# Altium PCB CL-HC-V2.0.PcbDoc (part 2 of 3)
Units mil, origin at the board's own origin, x right, y up, seen from the top; angles counter-clockwise.
Board outline 12846.15 x 9153.85 mil, 2 copper layers (TopLayer, BottomLayer); 137 components, 528 nets, 534 pads, 1 vias.
Unrouted connection lines stored in the file: 27.
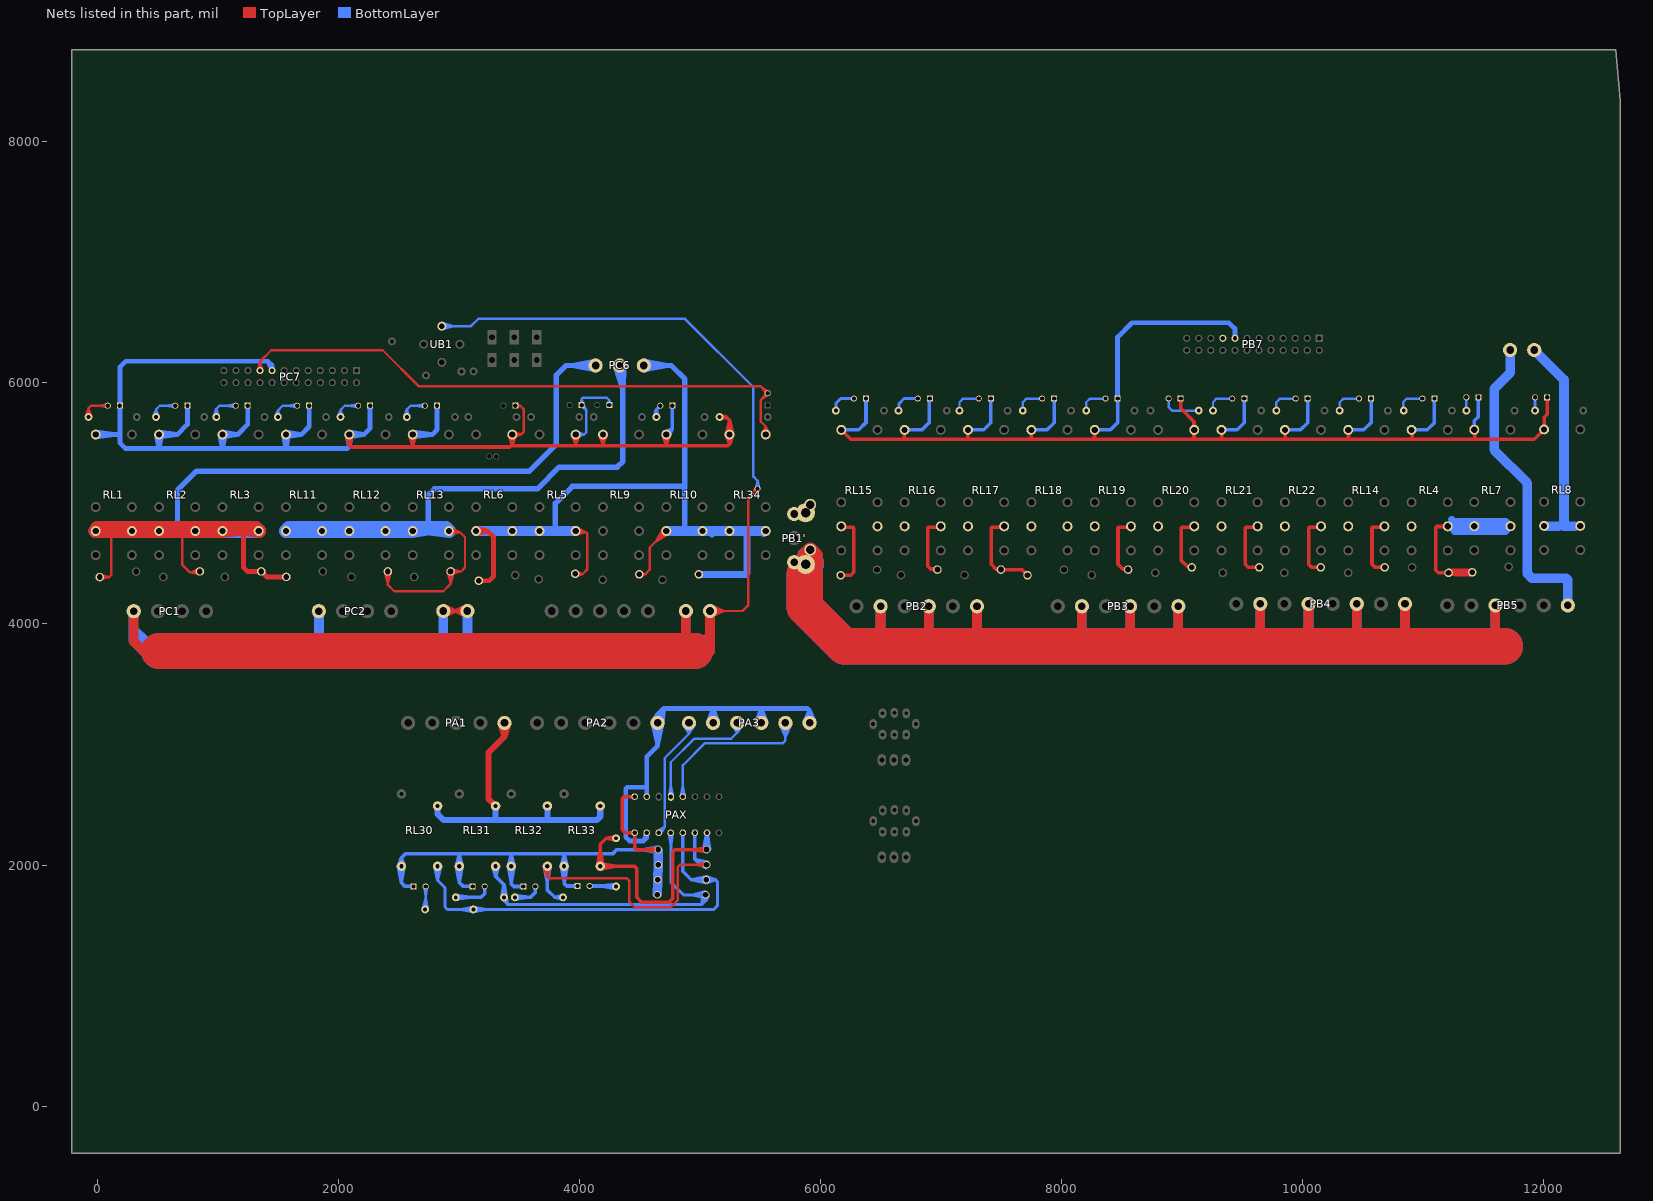
[diagram p2: the nets of this part, all layers, seen from the top]

## Via types
v1: diameter 40, hole 24, TopLayer to BottomLayer, tented both sides, 1 vias

## Nets (pads, with @x,y where several pads share a name; then routed paths per layer and width w, separated by ;. In a path a pad name is that pad's centre, name@x,y a point inside that pad or via, vN(x,y) a via of type N, cw(c..) or ccw(c..) an arc to the next point about the centre after c; other vN are vias at no path point) (continued)
24V: D15.A D16.A D17.A D18.A D19.K D20.K D21.K D22.K D37.A D38.A D39.A D40.A D41.A D42.A D43.A D44.A D45.A D46.A D47.A D48.A D49.A D50.A D51.A D52.A D53.A D54.A D55.A D61.A D65.A D67.A pad.0@11427.56,5602.53 PAX.1 PAX.2 PB7.15 PC7.15 R292.1 RL1.1 RL2.1 RL3.1 RL4.1 RL5.2 RL6.2 RL7.1 RL8.1 RL9.1 RL10.1 RL11.1 RL12.1 RL13.1 RL14.1 RL15.1 RL16.1 RL17.1 RL18.1 RL19.1 RL20.2 RL21.1 RL22.1 RL30.1 RL31.1 RL32.1 RL33.1 RL34.2 | length 42944.3
  TopLayer w20: RL6.2@3444.58,5570.44 3516.48,5570.44 ; RL6.2@3445.47,5559.14 3516.48,5570.44 ; RL6.2@3445.47,5581.75 3516.48,5570.44 ; RL6.2@3451.41,5539.86 3516.48,5570.44 ; RL6.2@3451.41,5601.03 3516.48,5570.44 ; D61.A@3470,5810 3510.78,5810 ; D61.A@3472.28,5796.57 3510.78,5810 ; D61.A@3472.28,5823.43 3510.78,5810 ; RL5.2@3939.6,5564.93 3970.45,5481.32 ; RL5.2@3959.13,5569.72 3970.45,5481.32 ; 3967.81,5478.68 3970.45,5481.32 ; RL5.2@3970.45,5570.44 3970.45,5481.32 ; RL5.2@3981.77,5569.72 3970.45,5481.32 ; RL5.2@4001.3,5564.93 3970.45,5481.32 ; RL9.1@4165.46,5564.99 4196.32,5480.39 ; RL9.1@4185.01,5569.73 4196.32,5480.39 ; RL9.1@4196.32,5570.44 4196.32,5480.39 ; 4198.04,5478.68 4196.32,5480.39 ; RL9.1@4207.64,5569.73 4196.32,5480.39 ; RL9.1@4227.18,5564.99 4196.32,5480.39 ; 3510.78,5810 3538.67,5782.11 3538.67,5592.63 3516.48,5570.44
  TopLayer w30: RL12.1@2066.79,5566.5 2092.83,5482.44 ; RL12.1@2092.83,5570.44 2092.83,5482.44 ; RL12.1@2118.87,5566.5 2092.83,5482.44 ; RL13.1@2592.64,5566.62 2618.7,5479.67 ; RL13.1@2618.7,5570.44 2618.7,5479.67 ; RL13.1@2644.76,5566.62 2618.7,5479.67 ; RL6.2@3418.59,5566.18 3444.58,5489.13 ; RL6.2@3444.58,5570.44 3444.58,5489.13 ; RL6.2@3470.57,5566.18 3444.58,5489.13 ; PAX.1@4459.58,2567.3 4370.91,2567.3 4355.83,2552.22 4355.83,2292.22 4380.75,2267.3 ; D19.K@4655.16,2111.75 4534.78,2128.21 D19.K@4655.16,2144.67 ; D19.K@4656.28,2128.21 4473.6,2128.21 4459.58,2142.22 PAX.2@4459.58,2267.3 ; RL10.1@4696.14,5566.58 4722.2,5480.51 ; RL10.1@4722.2,5570.44 4722.2,5480.51 ; RL10.1@4748.25,5566.58 4722.2,5480.51 ; R292.1@5166.09,5699.02 5220.02,5716.31 ; R292.1@5166.09,5733.6 5220.02,5716.31 ; RL34.2@5220.52,5573.35 5246.7,5689.63 ; RL34.2@5220.74,5565.99 5246.7,5492.48 ; RL34.2@5272.66,5565.99 5246.7,5492.48 ; RL34.2@5272.88,5573.35 5246.7,5689.63 ; RL15.1@6173.4,5609.8 6252.01,5531.19 11921.14,5531.19 RL8.1@12003.49,5613.54 ; 6696.86,5534.16 RL16.1@6696.86,5602.53 ; 7222.57,5534.16 RL17.1@7222.57,5602.53 ; 7748.28,5534.16 RL18.1@7748.28,5602.53 ; 8274,5534.16 RL19.1@8274,5602.53 ; D37.A@8988.5,5869.33 8988.5,5789.33 9099.71,5678.13 9099.71,5534.16 ; 9329.69,5534.16 RL21.1@9329.69,5602.53 ; 9855.4,5534.16 RL22.1@9855.4,5602.53 ; 10381.11,5534.16 RL14.1@10381.11,5602.53 ; 10909.59,5538.92 RL4.1@10909.59,5607.29 ; 11427.56,5534.16 pad.0@11427.56,5602.53 ; RL8.1@12004.84,5612.19 RL8.1@12003.49,5613.54 ; D43.A@12028.5,5879.33 12028.5,5739.33 12003.49,5714.32 RL8.1@12003.49,5613.54 ; 2092.83,5482.44 2107.94,5467.33 2631.05,5467.33 ; 2618.7,5479.67 2631.05,5467.33 ; 2631.05,5467.33 3422.77,5467.33 3434.12,5478.68 ; 3434.12,5478.68 3444.58,5489.13 ; 3434.12,5478.68 3967.81,5478.68 4198.04,5478.68 4720.36,5478.68 ; 4380.75,2267.3 PAX.2@4459.58,2267.3 ; 4380.75,2267.3 PAX.2@4459.58,2267.3 ; 4720.36,5478.68 5232.9,5478.68 5246.7,5492.48 ; 4720.36,5478.68 4722.2,5480.51 ; 5220.02,5716.31 R292.1@5163.39,5716.31 5220.02,5716.31 ; 5220.02,5716.31 5246.7,5689.63 ; 5246.7,5492.48 RL34.2@5246.7,5570.44 5246.7,5689.63
  BottomLayer w20: RL5.2@3970.45,5570.44 4039.6,5570.44 ; RL5.2@3971.38,5559.14 4039.6,5570.44 ; RL5.2@3971.38,5581.74 4039.6,5570.44 ; RL5.2@3977.55,5539.92 4039.6,5570.44 ; RL5.2@3977.55,5600.97 4039.6,5570.44 ; D65.A@4006.5,5816.86 4020,5865 ; D65.A@4011.63,5804.25 4059.04,5775.96 ; D65.A@4030.75,5823.37 4059.04,5775.96 ; D65.A@4033.5,5816.86 4020,5865 ; D67.A@4235.85,5818.25 4249.27,5855.73 ; D67.A@4249.27,5815.92 4249.27,5855.73 ; D67.A@4262.69,5818.25 4249.27,5855.73 ; 4020,5865 D65.A@4020,5815 4059.04,5775.96 ; 4020,5865 4030,5875 4230,5875 4249.27,5855.73 ; 4039.6,5570.44 4059.04,5589.88 4059.04,5775.96
  BottomLayer w30: RL30.1@2500.84,1987.79 2525.1,1860.72 RL30.1@2549.36,1987.79 ; RL30.1@2501.09,1994.25 2525.1,2061.49 ; RL30.1@2549.12,1994.25 2525.1,2061.49 ; D18.A@2625.83,1822.74 2555.32,1822.74 2525.1,1852.95 RL30.1@2525.1,1990.09 2525.1,2061.49 ; RL31.1@2981.57,1987.79 3005.83,1860.72 RL31.1@3030.09,1987.79 ; RL31.1@2981.64,1993.06 3005.83,2090.09 ; RL31.1@3030.02,1993.06 3005.83,2090.09 ; D17.A@3115.83,1822.74 3039.21,1822.74 3005.83,1856.11 RL31.1@3005.83,1990.09 3005.83,2090.09 ; RL32.1@3411.24,1987.79 3435.5,1860.72 ; RL32.1@3411.31,1993.06 3435.5,2090.09 ; RL32.1@3459.69,1993.06 3435.5,2090.09 ; RL32.1@3459.76,1987.79 3435.5,1860.72 ; RL33.1@3849.96,1987.79 3874.22,1860.72 RL33.1@3898.48,1987.79 ; RL33.1@3850.03,1993.06 3874.22,2090.09 ; RL33.1@3898.41,1993.06 3874.22,2090.09 ; D15.A@3973.91,1826.11 3895.83,1826.11 ; D15.A@3985.83,1826.11 3895.83,1826.11 ; D21.K@4623.76,1750.99 D20.K@4628.18,1874.4 ; D21.K@4623.92,1755.72 D20.K@4652.32,1877.75 ; D21.K@4624.01,1756.32 D20.K@4656.28,1882.75 ; D21.K@4624.98,1760.27 D20.K@4676.63,1876.04 ; D22.K@4631.96,1999.77 D20.K@4652.32,1877.75 ; D22.K@4632.02,2003.74 D19.K@4656.28,2128.21 ; D22.K@4632.12,2004.57 D20.K@4628.14,1880.79 ; D22.K@4632.75,1995.04 D20.K@4676.64,1879.3 ; D22.K@4632.92,2008.33 D19.K@4680.54,2125.91 ; D19.K@4653.98,2103.95 4526.91,2128.21 D19.K@4653.98,2152.47 ; D21.K@4671.63,1758.81 D20.K@4628.18,1874.4 ; D21.K@4672.24,1749.35 D20.K@4676.63,1876.04 ; D21.K@4672.4,1754.08 D20.K@4652.32,1877.75 ; D21.K@4672.44,1753.27 D20.K@4656.28,1882.75 ; D22.K@4679.35,1993.55 D20.K@4628.14,1880.79 ; D22.K@4679.64,2008.33 D19.K@4632.02,2125.91 ; D22.K@4680.44,1998.22 D20.K@4652.32,1877.75 ; D22.K@4680.54,2003.74 D19.K@4656.28,2128.21 ; D22.K@4680.6,2003.02 D20.K@4676.64,1879.3 ; RL10.1@4707.37,5592.21 4772.2,5620.44 ; RL10.1@4722.2,5570.44 4772.2,5620.44 ; RL10.1@4743.97,5555.61 4772.2,5620.44 ; 4772.2,5696.38 D49.A@4772.2,5810 4772.2,5620.44 ; RL15.1@6173.4,5609.8 6317.38,5609.8 6378.5,5670.92 D42.A@6378.5,5869.33 ; RL16.1@6699.03,5609.8 6843.02,5609.8 6904.14,5670.92 D41.A@6904.14,5869.33 ; RL17.1@7224.67,5609.8 7354.6,5609.8 7414.14,5669.33 D40.A@7414.14,5869.33 ; RL18.1@7750.3,5609.8 7880.24,5609.8 7939.77,5669.33 D39.A@7939.77,5869.33 ; RL19.1@8275.93,5609.8 8405.87,5609.8 8465.4,5669.33 D38.A@8465.4,5869.33 ; RL21.1@9327.2,5609.8 9457.13,5609.8 9516.67,5669.33 D46.A@9516.67,5869.33 ; RL22.1@9852.83,5609.8 9982.76,5609.8 10042.3,5669.33 D47.A@10042.3,5869.33 ; RL14.1@10378.46,5609.8 10508.4,5609.8 10567.93,5669.33 D45.A@10567.93,5869.33 ; RL4.1@10904.09,5609.8 11034.03,5609.8 11093.56,5669.33 D48.A@11093.56,5869.33 ; RL7.1@11424.12,5610.92 11424.12,5684.94 11458.5,5719.33 D44.A@11458.5,5879.33 ; 2525.1,2061.49 2555.83,2092.22 3007.96,2092.22 ; 3005.83,2090.09 3007.96,2092.22 ; 3007.96,2092.22 4275.83,2092.22 4311.82,2128.21 D19.K@4656.28,2128.21 ; 3435.5,1860.72 RL32.1@3435.5,1990.09 ; RL32.1@3435.5,1990.09 3435.5,1842.55 3455.83,1822.22 ; RL32.1@3435.5,1990.09 3435.5,2090.09 ; 3455.83,1822.22 D16.A@3535.83,1822.22 3455.83,1822.22 ; 3874.22,2090.09 RL33.1@3874.22,1990.09 3874.22,1847.72 3895.83,1826.11 ; D20.K@4628.14,1880.79 D22.K@4656.28,2001.4 ; D20.K@4628.14,1880.79 D22.K@4656.28,2007.27 ; D20.K@4628.18,1874.4 D21.K@4648.08,1752.53 ; D20.K@4628.18,1874.4 D21.K@4656.28,1760.73 ; D19.K@4632.02,2125.91 D22.K@4656.28,2001.4 ; D19.K@4632.02,2125.91 4632.02,1999.05 4656.28,1872.03 4680.54,1999.1 D19.K@4680.54,2125.91 ; D19.K@4632.02,2125.91 4656.28,1998.84 D19.K@4680.54,2125.91 ; D21.K@4648.08,1752.53 D20.K@4676.63,1876.04 ; D21.K@4648.08,1752.53 D20.K@4656.28,1882.75 ; D21.K@4648.08,1752.53 D20.K@4652.32,1877.75 ; D21.K@4648.08,1752.53 D21.K@4656.28,1760.73 ; D20.K@4652.32,1877.75 D22.K@4656.28,2001.4 ; D20.K@4652.32,1877.75 D21.K@4656.28,1760.73 ; D20.K@4652.32,1877.75 D22.K@4656.28,2007.27 ; D21.K@4656.28,1760.73 D20.K@4676.63,1876.04 ; D21.K@4656.28,1760.73 D19.K@4656.28,2128.21 ; D22.K@4656.28,2001.4 D20.K@4676.64,1879.3 ; D22.K@4656.28,2001.4 D19.K@4680.54,2125.91 ; D22.K@4656.28,2007.27 D20.K@4676.64,1879.3
  BottomLayer w40: RL1.1@-10.67,5570.44 189.56,5570.44 190,5570 ; RL1.1@-9.26,5549.15 150.67,5570.44 RL1.1@-9.26,5591.73 ; RL2.1@493.96,5568.41 515.21,5458.5 ; RL2.1@516.72,5549.16 665.44,5570.44 ; RL2.1@516.72,5591.73 665.44,5570.44 ; RL2.1@536.45,5568.41 515.21,5458.5 ; D51.A@750,5810 750,5655 665.44,5570.44 ; RL3.1@1019.83,5568.47 1041.08,5454.91 ; RL3.1@1042.91,5549.18 1165.44,5570.44 ; RL3.1@1042.91,5591.7 1165.44,5570.44 ; RL3.1@1062.33,5568.47 1041.08,5454.91 ; D50.A@1250,5810 1250,5655 1165.44,5570.44 ; RL11.1@1545.72,5568.38 1566.95,5460.14 ; RL11.1@1568.76,5549.18 1692.79,5570.44 ; RL11.1@1568.76,5591.7 1692.79,5570.44 ; RL11.1@1588.19,5568.38 1566.95,5460.14 ; D55.A@1760,5810 1760,5637.65 1692.79,5570.44 ; RL12.1@2071.62,5568.09 2092.83,5473.46 ; RL12.1@2094.73,5549.19 2212.79,5570.44 ; RL12.1@2094.73,5591.7 2212.79,5570.44 ; RL12.1@2114.04,5568.09 2092.83,5473.46 ; D54.A@2265.64,5810 2265.64,5623.3 2212.79,5570.44 ; RL13.1@2618.7,5570.44 2780.44,5570.44 2820,5610 D53.A@2820,5810 ; RL13.1@2620.11,5549.15 2780.04,5570.44 RL13.1@2620.11,5591.73 ; D38.A@8465.4,5869.33 8465.4,6379.33 8585,6498.93 9388.91,6498.93 9438.5,6449.33 PB7.15@9438.5,6369.33 ; 190,5570 D52.A@190,5810 190,6130 239.35,6179.35 1417.88,6179.35 ; 190,5570 190,5501.93 237.56,5454.37 511.08,5454.37 ; 511.08,5454.37 515.21,5458.5 ; 511.08,5454.37 1040.55,5454.37 ; 515.21,5458.5 RL2.1@515.21,5570.44 665.44,5570.44 ; 1040.55,5454.37 1041.08,5454.91 ; 1040.55,5454.37 1572.72,5454.37 ; 1041.08,5454.91 RL3.1@1041.08,5570.44 1165.44,5570.44 ; 1417.88,6179.35 1452.35,6144.89 ; 1417.88,6179.35 PC7.15@1452.35,6101.59 ; PC7.15@1452.35,6101.59 1452.35,6144.89 ; PC7.15@1452.35,6101.59 1452.35,6144.89 ; PC7.15@1452.35,6101.59 1452.35,6144.89 ; 1566.95,5460.14 RL11.1@1566.95,5570.44 1692.79,5570.44 ; 1566.95,5460.14 1572.72,5454.37 ; 1572.72,5454.37 2073.74,5454.37 2092.83,5473.46 ; 2092.83,5473.46 RL12.1@2092.83,5570.44 2212.79,5570.44
24V+: 
24V-情报-负压: PA3.1 PAX.6 | length 1606.9
  BottomLayer w20: PAX.6@4648.84,2281.11 4709.58,2317.3 ; PAX.6@4659.58,2267.3 4709.58,2317.3 ; PAX.6@4673.4,2256.55 4709.58,2317.3 ; PA3.1@4863.24,3165.53 4910.44,3088.9 ; PA3.1@4881.76,3174.21 4910.44,3088.9 ; PA3.1@4939.11,3174.21 4910.44,3088.9 ; PA3.1@4957.64,3165.53 4910.44,3088.9 ; 4709.58,2317.3 4709.58,2888.05 4910.44,3088.9 ; 4910.44,3088.9 PA3.1@4910.44,3178.9 4910.44,3088.9
24V-情报-远值: PA3.3 PAX.7 | length 1593.4
  BottomLayer w20: PAX.7@4744.64,2578.62 4759.58,2662.3 ; PAX.7@4759.58,2567.3 4759.58,2853.05 4955.44,3048.9 5260.44,3048.9 5310.44,3098.9 ; PAX.7@4759.58,2577.3 4759.58,2662.3 ; PAX.7@4774.53,2578.62 4759.58,2662.3 ; PA3.3@5263.74,3163.86 5310.44,3098.9 ; PA3.3@5281.86,3173.62 5310.44,3098.9 ; PA3.3@5310.44,3178.9 5310.44,3098.9 ; PA3.3@5339.01,3173.62 5310.44,3098.9 ; PA3.3@5357.13,3163.86 5310.44,3098.9
24V-情报-远启: PA3.5 PAX.9 | length 1993.8
  BottomLayer w20: PAX.9@4842.17,2569.05 4859.58,2654.8 PAX.9@4877,2569.05 ; PAX.9@4859.58,2567.3 4859.58,2828.05 5040.44,3008.9 5686.68,3008.9 5710.44,3032.65 PA3.5@5710.44,3178.9 ; PA3.5@5662.43,3168.79 5710.44,3059.84 ; PA3.5@5681.6,3175.35 5710.44,3059.84 ; PA3.5@5739.27,3175.35 5710.44,3059.84 ; PA3.5@5758.44,3168.79 5710.44,3059.84
24V-面板-值机: D21.A PAX.8 R217.2 RL31.2 | length 4426
  BottomLayer w25: R217.2@3359.48,1720.71 3405.83,1672.22 ; R217.2@3394.85,1738.4 3405.83,1672.22 ; PAX.8@4744.63,2266.2 4759.58,2164.8 ; PAX.8@4774.54,2266.2 4759.58,2164.8 ; D21.A@5021.77,1757.96 5017.77,1672.22 ; D21.A@5044.93,1725.84 4933.71,1752.53 D21.A@5044.93,1779.21 ; D21.A@5071.43,1739.22 5017.77,1672.22 ; 3405.83,1672.22 R217.2@3375.83,1732.22 3375.83,1702.22 3405.83,1672.22 ; 3405.83,1672.22 5017.77,1672.22 ; 4759.58,2164.8 PAX.8@4759.58,2267.3 4759.58,1858.47 4865.53,1752.53 D21.A@5048.08,1752.53 ; 5017.77,1672.22 D21.A@5048.08,1752.53 ; 5017.77,1672.22 5048.08,1702.53 ; 5048.08,1702.53 D21.A@5048.08,1752.53 ; 5048.08,1702.53 5022.2,1745.31 5048.08,1702.53 ; 5048.08,1702.53 5073.96,1745.31 5048.08,1702.53 ; 5048.08,1702.53 D21.A@5048.08,1752.53
  BottomLayer w30: RL31.2@3281.72,1986.55 3305.83,1906.11 ; RL31.2@3305.83,1990.09 3305.83,1906.11 ; RL31.2@3329.94,1986.55 3305.83,1906.11 ; R217.2@3358.39,1733.69 3375.83,1836.11 ; R217.2@3375.83,1732.22 3375.83,1836.11 ; R217.2@3393.27,1733.69 3375.83,1836.11 ; 3305.83,1906.11 3375.83,1836.11
24V-面板-故障: D19.A PAX.14 R215.2 RL33.2 | length 3775.7
  TopLayer w30: RL33.2@4149.96,1992.38 4174.22,2119.46 RL33.2@4198.48,1992.38 ; RL33.2@4176.52,1965.83 4303.59,1990.09 RL33.2@4176.52,2014.35 ; R215.2@4303.96,2204.82 4224.22,2222.22 ; R215.2@4303.96,2239.62 4224.22,2222.22 ; D19.A@5055.16,2111.75 4934.78,2128.21 D19.A@5055.16,2144.67 ; D19.A@5056.28,2128.21 4795.83,2128.21 4775.83,2108.21 4775.83,1722.53 4744.34,1691.03 4622.61,1691.03 4621.42,1692.22 4515.83,1692.22 4475.83,1732.22 4475.83,1972.22 4457.96,1990.09 RL33.2@4174.22,1990.09 4174.22,2172.22 4224.22,2222.22 ; 4224.22,2222.22 R215.2@4305.83,2222.22 4224.22,2222.22
  BottomLayer w30: D19.A@5032.09,2131.12 PAX.14@5059.58,2257.66 ; D19.A@5036.5,2151.44 PAX.14@5059.58,2267.3 ; D19.A@5056.83,2149.82 PAX.14@5059.58,2267.3 ; D19.A@5077.16,2150.75 PAX.14@5059.58,2267.3 ; D19.A@5080.59,2129.88 PAX.14@5059.58,2257.66 ; PAX.14@5059.58,2257.66 D19.A@5056.28,2128.21 5059.58,2131.51 PAX.14@5059.58,2267.3
24V-面板-滤网: D22.A PAX.12 R216.2 RL32.2 | length 3935.7
  TopLayer w20: RL32.2@3706.55,1985.16 3735.5,1902.55 ; RL32.2@3735.5,1990.09 3735.5,1902.55 ; RL32.2@3764.46,1985.16 3735.5,1902.55 ; D22.A@5053.76,1980.05 4964.78,2001.4 D22.A@5053.76,2022.74 ; D22.A@5056.28,2001.4 4835.01,2001.4 4815.83,1982.22 4815.83,1705.96 4760.9,1651.03 4460.45,1651.03 4415.83,1695.65 4415.83,1867.75 4391.37,1892.22 3745.83,1892.22 3735.5,1902.55
  BottomLayer w30: RL32.2@3711.24,1987.79 3735.5,1860.72 RL32.2@3759.76,1987.79 ; RL32.2@3735.5,1990.09 3735.5,1792.55 3795.83,1732.22 ; R216.2@3863.64,1714.86 3795.83,1732.22 ; R216.2@3863.64,1749.58 3795.83,1732.22 ; R216.2@3865.83,1732.22 3795.83,1732.22 ; PAX.12@4959.58,2267.3 4959.58,2048.47 ; D22.A@5043.2,1980.83 4959.58,2048.47 ; D22.A@5064.4,2024.38 4959.58,2048.47 ; 4959.58,2048.47 D22.A@5056.28,2001.4 ; 4959.58,2048.47 5006.66,2001.4 ; 5006.66,2001.4 D22.A@5056.28,2001.4 ; 5006.66,2001.4 5050.3,2025.02 5006.66,2001.4 ; 5006.66,2001.4 5050.3,1977.77 5006.66,2001.4 ; 5006.66,2001.4 D22.A@5056.28,2001.4
24V-面板-运行: D20.A PAX.10 R218.2 RL30.2 | length 4543.3
  BottomLayer w25: RL30.2@2798.42,1986.93 2825.1,1875.72 RL30.2@2851.79,1986.93 ; RL30.2@2825.1,1990.09 2825.1,1872.95 2885.83,1812.22 2885.83,1732.22 2885.83,1652.22 2905.83,1632.22 5115.83,1632.22 5145.83,1662.22 5145.83,1862.22 5130.3,1877.75 ; R218.2@3119.96,1612.31 3014.32,1632.22 R218.2@3119.96,1652.13 ; R218.2@3123.68,1612.31 3229.32,1632.22 R218.2@3123.68,1652.13
  BottomLayer w30: PAX.10@4859.58,2267.3 4859.58,1948.47 4930.3,1877.75 ; D20.A@5049.88,1853.51 4930.3,1877.75 ; D20.A@5049.88,1902 4930.3,1877.75 ; D20.A@5056.12,1853.68 5130.3,1877.75 ; D20.A@5056.12,1901.82 5130.3,1877.75 ; 4930.3,1877.75 D20.A@5052.32,1877.75 5130.3,1877.75
24VIN: 
24VIN2: 
164CLK: 
164SDA: 
165S_DO1: 
165S_DO2: 
165S_DO3: 
165S_DO4: 
220V_N: pad.0@5876.88,4493.05 pad.2 PB1'.1 PB1.1 PB2.2 PB2.4 PB2.6 PB3.2 PB3.4 PB3.6 PB4.2 PB4.4 PB4.6 PB4.8 PB5.3 PC1.1 PC2.1 PC3.1 PC3.2 PC5.1 PC5.2 UB1.1 | length 37723.1
  TopLayer w20: PC3.2@2872.64,4106.99 PC3.1@3072.64,4106.99 ; PC3.2@2876.19,4078.16 2991.7,4106.99 ; PC3.2@2876.19,4135.83 2991.7,4106.99 ; PC3.2@2882.75,4058.99 2991.7,4106.99 ; PC3.2@2882.75,4155 2991.7,4106.99 ; PC3.1@3062.54,4058.99 2953.59,4106.99 ; PC3.1@3062.54,4155 2953.59,4106.99 ; PC3.1@3069.1,4078.16 2953.59,4106.99 ; PC3.1@3069.1,4135.83 2953.59,4106.99 ; PC5.1@5084.85,4106.99 5355.37,4106.99 5400.88,4152.5 5400.88,5042.1 pad.2@5479.2,5120.42 5411.77,5052.99 ; PC5.1@5088.39,4078.16 5203.9,4106.99 ; PC5.1@5088.39,4135.83 5203.9,4106.99 ; PC5.1@5094.95,4058.99 5203.9,4106.99 ; PC5.1@5094.95,4155 5203.9,4106.99 ; pad.2@5467.79,5130.16 5411.77,5052.99 ; pad.2@5488.94,5109.01 5411.77,5052.99 ; PB1'.1@5766.94,4512.28 5770.31,4512.28 5870.31,4412.28
  TopLayer w80: PC1.1@305.12,4105.93 305.12,3854.64 385.17,3774.59 514.47,3774.59 ; 4884.85,3785.47 PC5.2@4884.85,4106.99 ; 5084.85,3774.25 PC5.1@5084.85,4106.99 ; 6499.43,3920.66 PB2.2@6499.43,4146.34 ; 6899.43,3967.41 PB2.4@6899.43,4146.34 ; 7299.43,3908.16 PB2.6@7299.43,4146.34 ; 8169.43,3920.66 PB3.2@8169.43,4146.34 ; 8569.43,3967.41 PB3.4@8569.43,4146.34 ; 8969.43,3908.16 PB3.6@8969.43,4146.34 ; 9649.43,3940.66 PB4.2@9649.43,4166.34 ; 10049.43,3940.66 PB4.4@10049.43,4166.34 ; 10449.43,3928.16 PB4.6@10449.43,4166.34 ; 10849.43,3928.16 PB4.8@10849.43,4166.34 ; 11599.38,3917.55 PB5.3@11599.38,4155.73
  TopLayer w120: 5870.31,4412.28 5870.31,4568.03 5916.54,4614.26 5962.78,4568.03 ; pad.0@5883.2,4506.05 5929.44,4552.28 ; pad.0@5925.29,4459.81 5971.53,4506.05
  TopLayer w300: 514.47,3774.59 514.81,3774.25 4959.37,3774.25 ; 5870.31,4412.28 5870.31,4140.87 6196.38,3814.8 11676.16,3814.8
  BottomLayer w20: UB1.1@2860,6470 3102.18,6470 3162.18,6529.99 4877.77,6529.99 5444.73,5963.03 5444.73,5222.21 5479.19,5187.76 ; UB1.1@2863.88,6442.77 2957.5,6470 UB1.1@2863.88,6497.23 ; pad.2@5464.29,5122.09 5479.19,5187.76 ; pad.2@5494.1,5122.09 5479.19,5187.76 ; 5479.19,5187.76 pad.2@5479.2,5120.42 5479.19,5187.76
  BottomLayer w80: PC1.1@300.51,4099.25 300.51,3959.25 ; PC1.1@305.12,4105.93 300.51,3959.25 ; 425.45,3734.31 300.51,3859.25 300.51,3959.25 ; 475.51,3844.25 415.51,3844.25 300.51,3959.25 ; PC2.1@1840.12,4105.93 1841.7,3876.05 PC2.1@1841.7,4098.31 ; 2872.64,3884.2 PC3.2@2872.64,4106.99 ; 3072.64,3896.8 PC3.1@3072.64,4106.99 ; 4884.85,3780.55 PC5.2@4884.85,4106.99 ; 4959.37,3774.25 5084.85,3899.73 PC5.1@5084.85,4106.99 ; 6499.43,3920.66 PB2.2@6499.43,4146.34 ; 6899.43,3967.41 PB2.4@6899.43,4146.34 ; 7299.43,3908.16 PB2.6@7299.43,4146.34 ; 8169.43,3920.66 PB3.2@8169.43,4146.34 ; 8569.43,3967.41 PB3.4@8569.43,4146.34 ; 8969.43,3908.16 PB3.6@8969.43,4146.34 ; 9649.43,3940.66 PB4.2@9649.43,4166.34 ; 10049.43,3940.66 PB4.4@10049.43,4166.34 ; 10449.43,3928.16 PB4.6@10449.43,4166.34 ; 10849.43,3928.16 PB4.8@10849.43,4166.34 ; 11599.38,3917.55 PB5.3@11599.38,4155.73
  BottomLayer w120: pad.0@5870.31,4552.68 5870.31,4574.42 ; 5939.66,4569.41 PB1.1@5939.66,4591.15 ; 5971.53,4490.55 5971.53,4512.28
  BottomLayer w300: 514.81,3774.25 4959.37,3774.25 ; 5870.31,4412.28 5870.31,4140.87 6196.38,3814.8 11676.16,3814.8
485-A: 
485-B: 
485_GND_1: 
485_GND_2: 
485_GND_3: 
485_VCC_1: 
485_VCC_2: 
485_VCC_3: 
+10V: 
+15V: 
<-变频故障: 
<-变频运行: 
<-工频故障: 
<-工频运行: 
<-急停按钮: 
<-本地值机: 
<-本地运行: 
<-远值使能: 
<-远起使能: 
AC24GATE1: 
AC24GATE2: 
AC24V1: PB6.1 RL8.4 | length 1777
  BottomLayer w80: PB6.1@11921.07,6272.28 12168.5,6024.85 12168.5,4809.8 12259.02,4809.8 ; RL8.4@12003.49,4813.54 12007.23,4809.8 12123.48,4809.8
AC24V2: PB5.6 PB6.2 | length 2591.2
  BottomLayer w80: PB6.2@11721.07,6272.28 11721.07,6082.28 11588.5,5949.71 11588.5,5443.64 11863.8,5168.34 11863.8,4416.71 11900.34,4380.17 12184.83,4380.17 12199.38,4365.62 PB5.6@12199.38,4155.73
AD1: 
AD2: 
AD3: 
AD4: 
AD5: 
AD6: 
CLK_165: 
C变频: 
C情报输出: PA1.5 RL30.4 RL31.4 RL32.4 RL33.4 | length 2766.9
  TopLayer w50: RL31.4@3305.83,2490.09 3245.83,2550.09 3245.83,2932.22 3380.44,3066.82 ; PA1.5@3346.78,3173.73 3380.44,3066.82 ; PA1.5@3380.44,3178.9 3380.44,3066.82 ; PA1.5@3414.1,3173.73 3380.44,3066.82
  BottomLayer w50: RL30.4@2825.1,2490.09 2825.1,2422.95 2875.83,2372.22 3305.67,2372.22 ; RL31.4@3305.83,2490.09 3305.83,2372.38 3305.67,2372.22 ; RL32.4@3735.5,2490.09 3735.5,2372.22 ; RL33.4@4174.22,2490.09 4174.22,2402.22 4144.22,2372.22 3735.5,2372.22 ; 3305.67,2372.22 3735.5,2372.22
DA_ADD1: 
DA_ADD2: 
DA_WR1: 
DA_WR2: 
DB0: 
DB1: 
DB2: 
DB3: 
DB4: 
DB5: 
DB6: 
DB7: 
DE/RE: 
DE/RE2: 
DI1: 
DI2: 
DI3: 
DI4: 
DI5: 
DI6: 
DI7: 
DI8: 
DI9: 
DI10: 
DI11: 
DI12: 
DI13: 
DI14: 
DI15: 
DI15A: 
DI16: 
DI17: 
DI18: 
DI19: 
DI20: 
DI21: 
DI22: 
DI23: 
DI24: 
DI25: 
DI26: 
DI27: 
DI28: 
DI29: 
DI30: 
DI31: 
DI32: 
DI33: 
DI34: 
DI35: 
DI36: 
DI37: 
DI38: 
DI39: 
DI40: 
EX_A1: 
EX_B1: 
GND: D110.K PA2.1 PA3.2 PA3.4 PA3.6 PAX.3 PAX.4 PB7.17 PC7.17 RL34.1 | length 10976.8
  TopLayer w20: PC7.17@1332.98,6104.1 1352.35,6177.35 ; PC7.17@1371.71,6104.1 1352.35,6177.35 ; RL34.1@5516.23,5577.76 5546.7,5637.54 ; RL34.1@5535.4,5571.4 5546.7,5637.54 ; RL34.1@5546.7,5570.44 5546.7,5637.54 ; D110.K@5552.96,5904.68 5506.83,5970 ; D110.K@5552.97,5922.25 5505.89,5855.96 ; RL34.1@5558,5571.4 5546.7,5637.54 ; D110.K@5572.15,5923.87 5506.83,5970 ; D110.K@5572.17,5903.05 5505.89,5855.96 ; RL34.1@5577.17,5577.76 5546.7,5637.54 ; 1352.35,6177.35 PC7.17@1352.35,6101.59 1352.35,6177.35 ; 1352.35,6177.35 1445,6270 2370,6270 2670,5970 5506.83,5970 ; 5505.89,5855.96 D110.K@5563.38,5913.45 ; 5505.89,5855.96 D110.K@5563.38,5913.45 ; 5505.89,5855.96 5505.89,5678.35 5546.7,5637.54 ; 5506.83,5970 D110.K@5563.38,5913.45
  BottomLayer w40: PAX.3@4559.58,2567.3 4559.58,2645.06 ; PA2.1@4611.29,3174.64 4650.11,2999.84 ; PA2.1@4616.77,3199.24 4700.44,3298.9 ; PA2.1@4687.98,3169.37 4700.44,3298.9 ; PA2.1@4688.93,3174.64 4650.11,2999.84 ; PA3.2@5071.94,3185.45 5110.44,3295.28 ; PA3.2@5110.44,3178.9 5110.44,3295.28 ; PA3.2@5148.94,3185.45 5110.44,3295.28 ; PA3.4@5471.96,3185.6 5510.44,3292.65 ; PA3.4@5510.44,3178.9 5510.44,3292.65 ; PA3.4@5548.91,3185.6 5510.44,3292.65 ; PA3.6@5872.13,3186.53 5910.44,3278.9 ; PA3.6@5910.44,3178.9 5910.44,3278.9 ; PA3.6@5948.74,3186.53 5910.44,3278.9 ; 4534.8,2200.42 PAX.4@4559.58,2267.3 ; 4534.8,2200.42 4417.29,2200.42 4386.38,2231.34 4386.38,2633.96 4397.48,2645.06 4559.58,2645.06 ; 4534.8,2200.42 4559.58,2225.21 ; 4559.58,2225.21 PAX.4@4559.58,2267.3 ; 4559.58,2225.21 PAX.4@4559.58,2267.3 ; 4559.58,2645.06 4559.58,2899.15 4650.11,2989.68 PA2.1@4650.11,3178.9 ; 4650.11,2999.84 PA2.1@4650.11,3178.9 ; PA2.1@4650.11,3178.9 4650.11,3248.57 ; PA2.1@4650.11,3178.9 4700.44,3298.9 ; PA2.1@4650.11,3178.9 4650.11,3248.57 ; 4650.11,3248.57 4687.6,3189.85 4650.11,3248.57 ; 4650.11,3248.57 4612.62,3189.85 4650.11,3248.57 ; 4650.11,3248.57 4700.44,3298.9 ; 4700.44,3298.9 5106.81,3298.9 ; 5106.81,3298.9 5110.44,3295.28 ; 5106.81,3298.9 5504.19,3298.9 ; 5504.19,3298.9 5890.44,3298.9 5910.44,3278.9 ; 5504.19,3298.9 5510.44,3292.65
IN2-A+: 
IN2-B-: 
IN-A+: 
IN-B-: 
L: pad.0@5876.88,4922.18 PB1'.3 PB1.2 RL4.4 RL7.4 RL14.4 RL15.4 RL16.4 RL17.4 RL18.4 RL19.4 RL20.4 RL21.4 RL22.4 RN1.1 RN2.1 RN3.1 RN4.1 RN5.1 RN6.1 RN11.1 RN12.1 RN13.1 RN14.1 RN21.1 | length 6808.8
  TopLayer w30: RN1.1@6168.25,4403.5 6252.7,4403.5 6276.74,4427.54 6276.74,4795.14 6268.4,4803.48 RL15.4@6177.43,4803.48 ; RN2.1@6977.89,4455.36 6914.78,4455.36 6891.27,4478.87 6891.27,4795.14 6899.61,4803.48 RL16.4@6990.58,4803.48 ; RN3.1@7498.23,4450.9 7670.85,4450.9 RN4.1@7718.25,4403.5 ; RN3.1@7503.6,4455.36 7455.63,4455.36 7416.98,4494.01 7416.98,4795.14 7425.32,4803.48 RL17.4@7516.3,4803.48 ; RN5.1@8555.03,4455.36 8507.06,4455.36 8468.4,4494.01 8468.4,4795.14 8476.75,4803.48 RL19.4@8567.72,4803.48 ; RN6.1@9080.61,4455.36 RN6.1@9080.74,4455.36 ; RN6.1@9080.61,4469.17 9050.59,4469.17 8994.12,4525.65 8994.12,4795.14 9002.46,4803.48 RL20.4@9093.43,4803.48 ; RL21.4@9623.41,4803.48 9532.44,4803.48 9524.1,4795.14 9524.1,4494.01 9548.94,4469.17 RN12.1@9629.17,4469.17 ; RL22.4@10149.12,4803.48 10058.15,4803.48 10049.81,4795.14 10049.81,4494.01 10074.65,4469.17 RN13.1@10150.61,4469.17 RN13.1@10154.88,4469.17 ; RL14.4@10674.84,4803.48 10583.86,4803.48 10575.52,4795.14 10575.52,4494.01 10600.37,4469.17 RN14.1@10680.61,4469.17 ; RL4.4@11203.32,4808.24 11112.34,4808.24 11104,4799.9 11104,4445.76 11126.27,4423.5 RN21.1@11209.07,4423.5
  TopLayer w60: RN21.1@11209.07,4423.5 11213.63,4428.06 RN11.1@11407.27,4428.06 ; 11270.19,4423.5 RN11.1@11392.11,4423.5
  BottomLayer w60: RL4.4@11204.09,4809.8 11205.21,4810.92 RL7.4@11424.12,4810.92 RL7.4@11724.12,4810.92 ; 11237.44,4866.91 11255.71,4848.63 11686.4,4848.63 RL7.4@11724.12,4810.92 ; 11255.71,4773.21 11260.85,4768.07 11681.27,4768.07 RL7.4@11724.12,4810.92
LAMP1: 
LAMP2: 
LAMP3: 
LAMP4: 
LAMP5: 
LAMP6: 
LAMP7: 
LAMP8: 
LAMP9: 
LAMP10: 
LAMP11: 
LAMP12: 
LAMP13: 
LAMP14: 
LOUT1: 
LOUT2: 
LOUT3: 
LOUT4: 
LOUT5: 
LOUT6: 
LOUT7: 
LOUT8: 
LOUT9: 
LOUT10: 
LOUT11: 
LOUT12: 
LOUT13: 
LOUT14: 
L加热: PC6.2 RL11.4 RL12.4 RL13.4 RN10.1 RN17.1 | length 12247.4
  TopLayer w20: RN10.1@2387.67,4431.84 2412.88,4339.79 RN10.1@2438.09,4431.84 ; RN10.1@2412.88,4435.23 2412.88,4323.77 2465.94,4270.71 2872.44,4270.71 2932.88,4331.15 RN17.1@2932.88,4435.23 3020.89,4435.23 ; RN17.1@2907.67,4431.84 2932.88,4339.79 RN17.1@2958.09,4431.84 ; RL13.4@2917.15,4759.21 2961.7,4758.77 ; RL13.4@2917.98,4759.13 3012.85,4758.77 ; RL13.4@2920.03,4739.13 3012.85,4758.77 ; RL13.4@2920.77,4781.59 3012.85,4758.77 ; RL13.4@2921.65,4739.24 2961.7,4758.77 ; RL13.4@2923.04,4780.92 2961.7,4758.77 ; RL13.4@2927.64,4800.48 3012.85,4758.77 ; RN17.1@2936.55,4410.06 3020.89,4435.23 ; RN17.1@2936.55,4460.39 3020.89,4435.23 ; RL13.4@2937.03,4795.87 2961.7,4758.77 ; 2961.7,4758.77 3012.85,4758.77 ; 2961.7,4758.77 RL13.4@2918.7,4770.44 3012.85,4758.77 ; 3012.85,4758.77 3052.38,4719.24 3052.38,4466.72 3020.89,4435.23
  BottomLayer w45: 2746.16,4793.35 2746.16,5068.72 2797.85,5120.41 3653,5120.41 3832.82,5300.24 4315.2,5300.24 4362.49,5347.53 4362.49,6117.04 PC6.2@4335.83,6143.7 4362.49,5941.31 ; PC6.2@4300.16,6135.7 4362.49,5941.31 ; PC6.2@4372.35,6145.21 4362.49,5941.31
  BottomLayer w118.11: 1692.12,4793.35 RL12.4@2092.83,4770.44 ; 1991.8,4793.35 RL12.4@2392.83,4770.44 ; 2217.55,4793.35 RL13.4@2618.7,4770.44 ; RL11.4@1566.95,4770.44 RL11.4@1589.86,4793.35 ; RL11.4@1566.95,4770.44 1972.97,4793.35 RL11.4@1866.95,4770.44 ; RL11.4@1566.95,4770.44 RL11.4@1866.95,4770.44 ; RL11.4@1589.86,4793.35 2746.16,4793.35 ; RL11.4@1589.86,4793.35 RL11.4@1866.95,4770.44 ; RL11.4@1866.95,4770.44 2268.03,4793.35 RL12.4@2092.83,4770.44 ; RL11.4@1866.95,4770.44 RL12.4@2092.83,4770.44 ; RL12.4@2092.83,4770.44 2493.73,4793.35 RL12.4@2392.83,4770.44 ; RL12.4@2092.83,4770.44 RL12.4@2392.83,4770.44 ; RL12.4@2392.83,4770.44 2746.16,4793.35 ; RL12.4@2392.83,4770.44 RL13.4@2618.7,4770.44 ; RL13.4@2618.7,4770.44 2746.16,4793.35 ; RL13.4@2618.7,4770.44 2746.16,4793.35 ; 2746.16,4793.35 2895.8,4793.35 RL13.4@2918.7,4770.44 2746.16,4793.35
L变频: PC6.3 RL5.4 RL6.4 RL10.4 RL34.4 RN8.1 RN9.1 RN23.1 RN24.1 | length 9484.1
  TopLayer w20: RL5.4@3965.44,4760.21 4056.41,4760.21 ; RN8.1@3965.81,4415.9 4026.1,4412.09 ; RN8.1@3969.59,4390.75 4026.1,4412.09 ; RL5.4@3969.85,4759.12 4056.41,4760.21 ; RL5.4@3970.45,4770.44 4056.41,4760.21 ; RL5.4@3972.44,4739.17 4056.41,4760.21 ; RL5.4@3972.52,4781.59 4056.41,4760.21 ; RN8.1@3972.72,4440.38 4026.1,4412.09 ; RN8.1@3978.13,4412.09 4026.1,4412.09 ; RL5.4@3979.73,4800.38 4056.41,4760.21 ; RN23.1@4497.57,4411.14 4545.54,4411.14 ; RN23.1@4504.31,4386.62 4545.54,4411.14 ; RN23.1@4504.31,4435.66 4545.54,4411.14 ; RL10.4@4697.19,4789.33 4639.05,4686.34 ; RL10.4@4711.02,4758.31 4584.19,4631.47 4584.19,4449.79 4545.54,4411.14 ; RL10.4@4713.76,4778.02 4639.05,4686.34 ; RL10.4@4722.2,4770.44 4639.05,4686.34 ; RL10.4@4729.87,4762.09 4639.05,4686.34 ; RL10.4@4741.37,4745.65 4639.05,4686.34 ; 4026.1,4412.09 4064.75,4450.74 4064.75,4751.87 4056.41,4760.21
  TopLayer w39.37: RL6.4@3144.58,4770.44 3241.8,4770.44 ; RL6.4@3146.99,4748.92 3241.8,4770.44 ; RL6.4@3146.99,4791.96 3241.8,4770.44 ; RN9.1@3167.07,4358.75 3251.82,4358.75 3289.76,4396.69 3289.76,4722.48 3241.8,4770.44
  BottomLayer w45: 3802.08,4770.44 3802.08,5000.55 3943.31,5141.77 4876.38,5141.77 ; PC6.3@4535.83,6143.7 4763.19,6143.7 4876.38,6030.51 4876.38,5141.77 ; PC6.3@4539.27,6107.31 4729.88,6143.7 PC6.3@4539.27,6180.09 ; 4874.92,4774.25 4876.38,4775.71 4876.38,5141.77
  BottomLayer w60: RN24.1@4992.2,4411.14 5380.83,4411.14 5391.91,4422.22 5391.91,4758.31 ; RL10.4@5022.2,4770.44 5100.51,4748.73 5090.93,4758.31 RL10.4@5022.2,4770.44
  BottomLayer w80: RL6.4@3144.58,4770.44 RL6.4@3444.58,4770.44 RL5.4@3670.45,4770.44 3802.08,4770.44 ; RL10.4@4722.2,4770.44 RL10.4@5022.2,4770.44 RL34.4@5246.7,4770.44 5519.32,4770.44 RL34.4@5530.51,4759.25 ; RL34.4@5265.36,4770.44 RL34.4@5546.7,4770.44 ; 3802.08,4770.44 RL5.4@3970.45,4770.44 3802.08,4770.44
L预热: PC6.1 RL1.4 RL2.4 RL3.4 RN15.1 RN18.1 RN19.1 RN20.1 | length 15496.7
  TopLayer w20: RL1.4@-10.82,4781.78 91.52,4777.46 ; RL1.4@-10.67,4770.44 91.52,4777.46 ; RL1.4@-9.27,4759.19 91.52,4777.46 ; RL1.4@-8.01,4801.67 91.52,4777.46 ; RL1.4@-3.76,4739.87 91.52,4777.46 ; RL1.4@18.6,4777.46 109.58,4777.46 117.92,4769.12 117.92,4406.11 100.71,4388.91 ; RN18.1@21.95,4388.91 100.71,4388.91 ; RN18.1@26.06,4363.81 100.71,4388.91 ; RN18.1@26.06,4414.01 100.71,4388.91 ; RL2.4@807.45,4800.81 713.62,4760.67 ; RL2.4@813.38,4739.16 713.62,4760.67 ; RL2.4@813.5,4781.65 713.62,4760.67 ; RL2.4@815.21,4770.44 713.62,4760.67 ; RL2.4@815.66,4759.11 713.62,4760.67 ; RN19.1@846.19,4459.77 771.98,4426.36 ; RL2.4@846.45,4760.67 708.47,4760.67 708.47,4489.87 771.98,4426.36 ; RN19.1@851.67,4409.82 771.98,4426.36 ; RN19.1@852.21,4426.36 771.98,4426.36 ; RN19.1@852.88,4435.23 771.98,4426.36
  TopLayer w39.37: 1215.91,4793.35 1215.91,4465.77 1246.46,4435.23 RN20.1@1362.88,4435.23 1408.55,4389.56 RN15.1@1570.52,4389.56
  TopLayer w118.11: 114.48,4793.35 RL2.4@515.21,4770.44 ; 391.97,4793.35 RL1.4@-10.67,4770.44 RL1.4@289.33,4770.44 ; 639.92,4793.35 RL3.4@1041.08,4770.44 ; 915.95,4793.35 RL2.4@515.21,4770.44 ; RL1.4@289.33,4770.44 690.33,4793.35 RL2.4@515.21,4770.44 ; RL1.4@289.33,4770.44 -0.59,4793.35 RL3.4@1041.08,4793.35 ; RL1.4@289.33,4770.44 RL2.4@515.21,4770.44 ; RL2.4@515.21,4770.44 RL2.4@815.21,4770.44 ; RL2.4@515.21,4770.44 414.17,4793.35 RL2.4@815.21,4770.44 ; RL2.4@815.21,4770.44 RL3.4@1041.08,4793.35 ; RL2.4@815.21,4770.44 RL3.4@1041.08,4770.44 ; RL3.4@1041.08,4770.44 1215.91,4793.35 ; RL3.4@1041.08,4793.35 1215.91,4793.35 ; 1215.91,4793.35 1318.18,4793.35 RL3.4@1341.08,4770.44 1215.91,4793.35
  BottomLayer w45: 667.72,4786.46 667.72,5109.29 825.2,5266.77 3586.02,5266.77 3810.43,5491.18 3810.43,6064.96 3889.17,6143.7 PC6.1@4135.83,6143.7 ; PC6.1@4132.38,6107.31 3941.77,6143.7 PC6.1@4132.38,6180.09
  BottomLayer w118.11: RL1.4@-10.67,4770.44 RL1.4@289.33,4770.44 RL2.4@515.21,4770.44 RL2.4@815.21,4770.44 RL3.4@1041.08,4770.44 RL3.4@1341.08,4770.44
NetC1_1: 
NetC14_1: 
NetC43_2: 
NetC44_2: 
NetD1_A: 
NetD6_A: 
NetD7_A: 
NetD8_A: 
NetD9_A: 
NetD10_A: 
NetD11_A: 
NetD12_A: 
NetD13_A: 
NetD14_A: 
NetD15_A: 
NetD15_K: D15.K R215.1 | length 589.9
  BottomLayer w30: D15.K@4085.83,1826.11 4301.94,1826.11 R215.1@4305.83,1822.22 4183.14,1826.11 ; R215.1@4304.03,1804.81 4183.14,1826.11 ; R215.1@4305.14,1839.71 4183.14,1826.11
NetD16_A: 
NetD16_K: D16.K R216.1 | length 481.6
  BottomLayer w30: R216.1@3465.83,1732.22 3595.83,1732.22 3635.83,1772.22 D16.K@3635.83,1822.22 ; R216.1@3467.08,1714.77 3588.33,1732.22 R216.1@3467.08,1749.68
NetD17_A: 
NetD17_K: D17.K R217.1 | length 557.9
  BottomLayer w30: R217.1@2975.83,1732.22 3185.83,1732.22 3215.83,1762.22 D17.K@3215.83,1822.74 ; R217.1@2977.08,1714.77 3098.33,1732.22 R217.1@2977.08,1749.68
NetD18_A: 
NetD18_K: D18.K R218.1 | length 637.8
  BottomLayer w20: R218.1@2699.62,1635.91 2725.83,1724.91 ; D18.K@2712.26,1821.63 2725.83,1739.11 D18.K@2739.41,1821.63 ; D18.K@2725.83,1822.74 2725.83,1636.24 R218.1@2721.82,1632.22 2725.83,1724.91 ; R218.1@2744.25,1633.98 2725.83,1724.91
NetD19_A: 
NetD20_A: 
NetD21_A: 
NetD22_A: 
NetD23_A: 
NetD24_A: 
NetD25_A: 
NetD26_A: 
NetD27_A: 
NetD28_A: 
NetD29_A: 
NetD30_A: 
NetD31_A: 
NetD32_A: 
NetD33_A: 
NetD34_A: 
NetD35_K: 
NetD36_K: 
NetD37_K: D37.K R147.1 | length 332.8
  BottomLayer w20: D37.K@8888.5,5869.33 8888.5,5799.33 8918.14,5769.7 R147.1@9139.03,5769.7
NetD38_K: D38.K R148.1 | length 242.4
  BottomLayer w20: R148.1@8205.4,5769.33 8205.4,5839.33 8235.4,5869.33 D38.K@8365.4,5869.33
NetD39_K: D39.K R149.1 | length 242.4
  BottomLayer w20: R149.1@7679.77,5769.33 7679.77,5839.33 7709.77,5869.33 D39.K@7839.77,5869.33
NetD40_K: D40.K R150.1 | length 242.4
  BottomLayer w20: R150.1@7154.14,5769.33 7154.14,5839.33 7184.14,5869.33 D40.K@7314.14,5869.33
NetD41_K: D41.K R151.1 | length 226.6
  BottomLayer w25: R151.1@6654.14,5769.33 6654.14,5829.33 6694.14,5869.33 D41.K@6804.14,5869.33
NetD42_K: D42.K R152.1 | length 226.6
  BottomLayer w25: R152.1@6128.5,5769.33 6128.5,5829.33 6168.5,5869.33 D42.K@6278.5,5869.33
NetD43_K: D43.K R153.1 | length 109.6
  BottomLayer w25: R153.1@11928.5,5769.7 D43.K@11928.5,5879.33
NetD44_K: D44.K R154.1 | length 110
  BottomLayer w20: R154.1@11358.5,5769.33 D44.K@11358.5,5879.33
NetD45_K: D45.K R155.1 | length 242.4
  BottomLayer w20: R155.1@10307.93,5769.33 10307.93,5839.33 10337.93,5869.33 D45.K@10467.93,5869.33
NetD46_K: D46.K R156.1 | length 242.4
  BottomLayer w20: R156.1@9256.67,5769.33 9256.67,5839.33 9286.67,5869.33 D46.K@9416.67,5869.33
NetD47_K: D47.K R157.1 | length 242.4
  BottomLayer w20: R157.1@9782.3,5769.33 9782.3,5839.33 9812.3,5869.33 D47.K@9942.3,5869.33
NetD48_K: D48.K R158.1 | length 242.4
  BottomLayer w20: R158.1@10833.56,5769.33 10833.56,5839.33 10863.56,5869.33 D48.K@10993.56,5869.33
NetD49_K: D49.K R159.1 | length 229.8
  BottomLayer w30: R159.1@4622.54,5718.81 4639.86,5777.66 ; R159.1@4639.86,5716.31 4639.86,5777.66 ; R159.1@4657.18,5718.81 4639.86,5777.66 ; D49.K@4672.2,5810 4639.86,5777.66
NetD50_K: D50.K R160.1 | length 543.4
  BottomLayer w20: R160.1@967.66,5720 989.86,5784.86 ; R160.1@989.86,5716.31 989.86,5784.86 ; R160.1@1012.05,5720 989.86,5784.86 ; D50.K@1148.89,5796.42 1066.38,5810 D50.K@1148.89,5823.58 ; D50.K@1150,5810 1015,5810 989.86,5784.86
NetD51_K: D51.K R161.1 | length 530.5
  BottomLayer w20: R161.1@467.72,5720.3 489.86,5779.86 ; R161.1@489.86,5716.31 489.86,5779.86 ; R161.1@512,5720.3 489.86,5779.86 ; D51.K@648.89,5796.42 566.38,5810 D51.K@648.89,5823.58 ; D51.K@650,5810 520,5810 489.86,5779.86
NetD52_K: D52.K R162.1 | length 556.4
  TopLayer w20: R162.1@-92.38,5719.75 -70.14,5789.86 ; R162.1@-70.14,5716.31 -70.14,5789.86 ; R162.1@-47.91,5719.75 -70.14,5789.86 ; D52.K@88.89,5796.42 6.38,5810 D52.K@88.89,5823.58 ; D52.K@90,5810 -50,5810 -70.14,5789.86
NetD53_K: D53.K R163.1 | length 520.5
  BottomLayer w20: R163.1@2547.72,5720.3 2569.86,5779.86 ; R163.1@2569.86,5716.31 2569.86,5779.86 ; R163.1@2592,5720.3 2569.86,5779.86 ; D53.K@2718.89,5796.42 2636.38,5810 D53.K@2718.89,5823.58 ; D53.K@2720,5810 2600,5810 2569.86,5779.86
NetD54_K: D54.K R164.1 | length 503.2
  BottomLayer w20: R164.1@1997.78,5720.64 2019.86,5774.86 ; R164.1@2019.86,5716.31 2019.86,5774.86 ; R164.1@2041.94,5720.64 2019.86,5774.86 ; D54.K@2164.53,5796.42 2082.02,5810 D54.K@2164.53,5823.58 ; D54.K@2165.64,5810 2055,5810 2019.86,5774.86
NetD55_K: D55.K R165.1 | length 504.7
  BottomLayer w20: R165.1@1477.86,5721.04 1499.86,5769.86 ; R165.1@1499.86,5716.31 1499.86,5769.86 ; R165.1@1521.86,5721.04 1499.86,5769.86 ; D55.K@1658.89,5796.42 1576.38,5810 D55.K@1658.89,5823.58 ; D55.K@1660,5810 1540,5810 1499.86,5769.86
NetD56_K: 
NetD57_K: 
NetD58_K: 
NetD59_K: 
NetD60_K: 